# EAGLE board Schemat_Eagle (EAGLE 9.2.2)
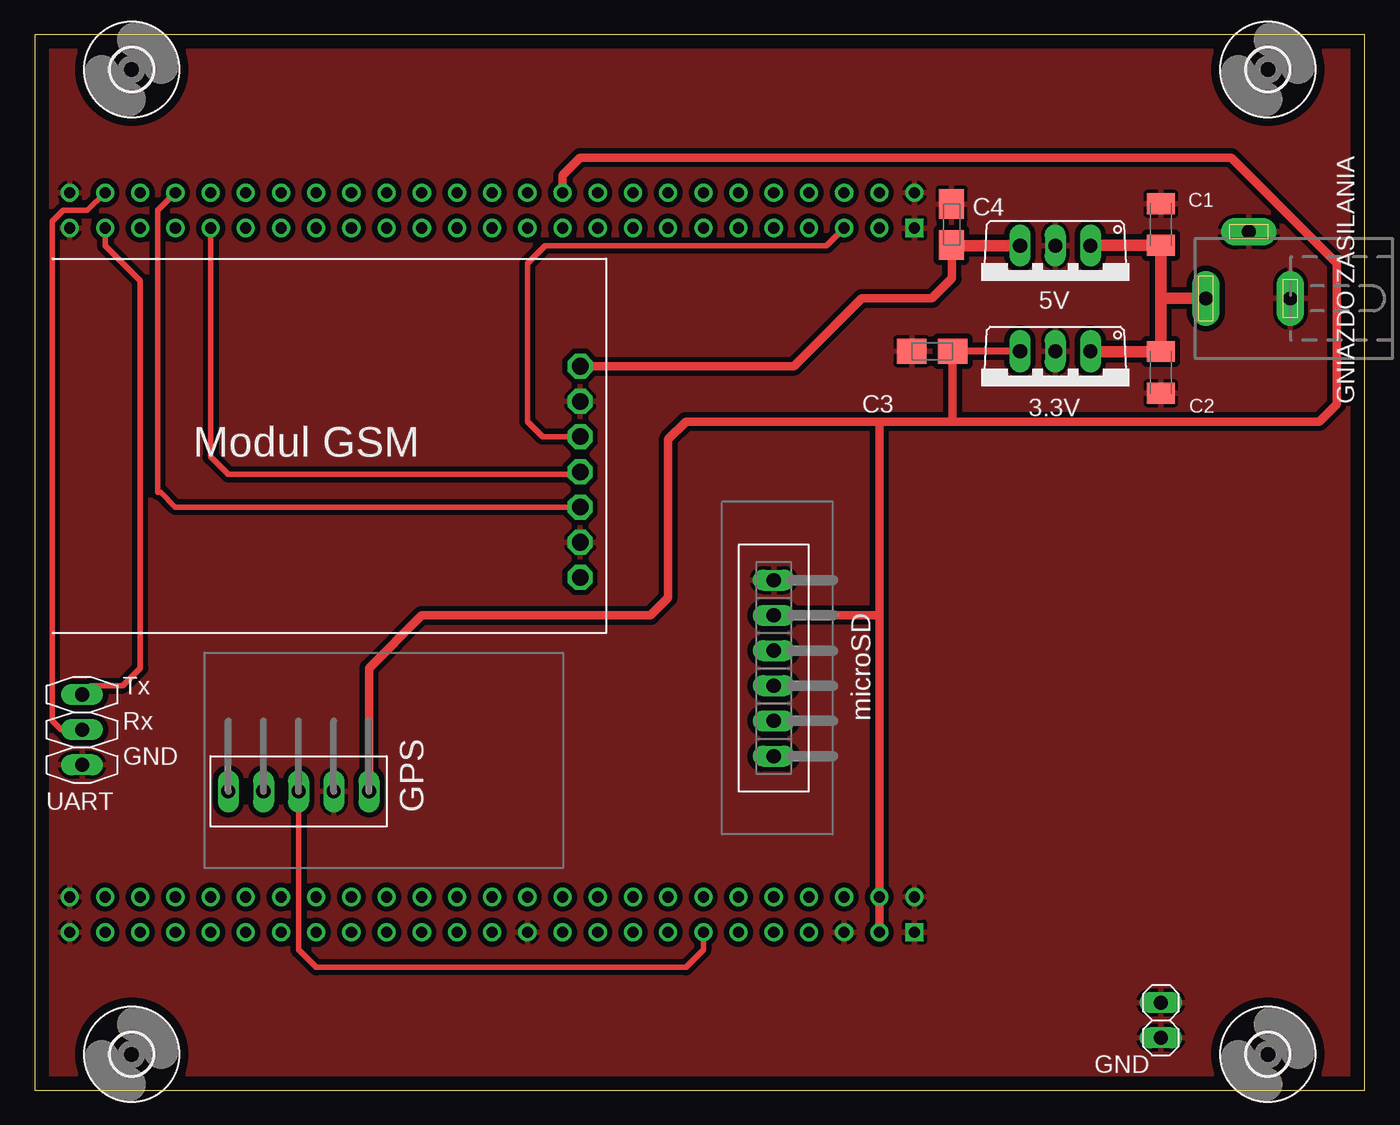
[diagram p0: board, top side]
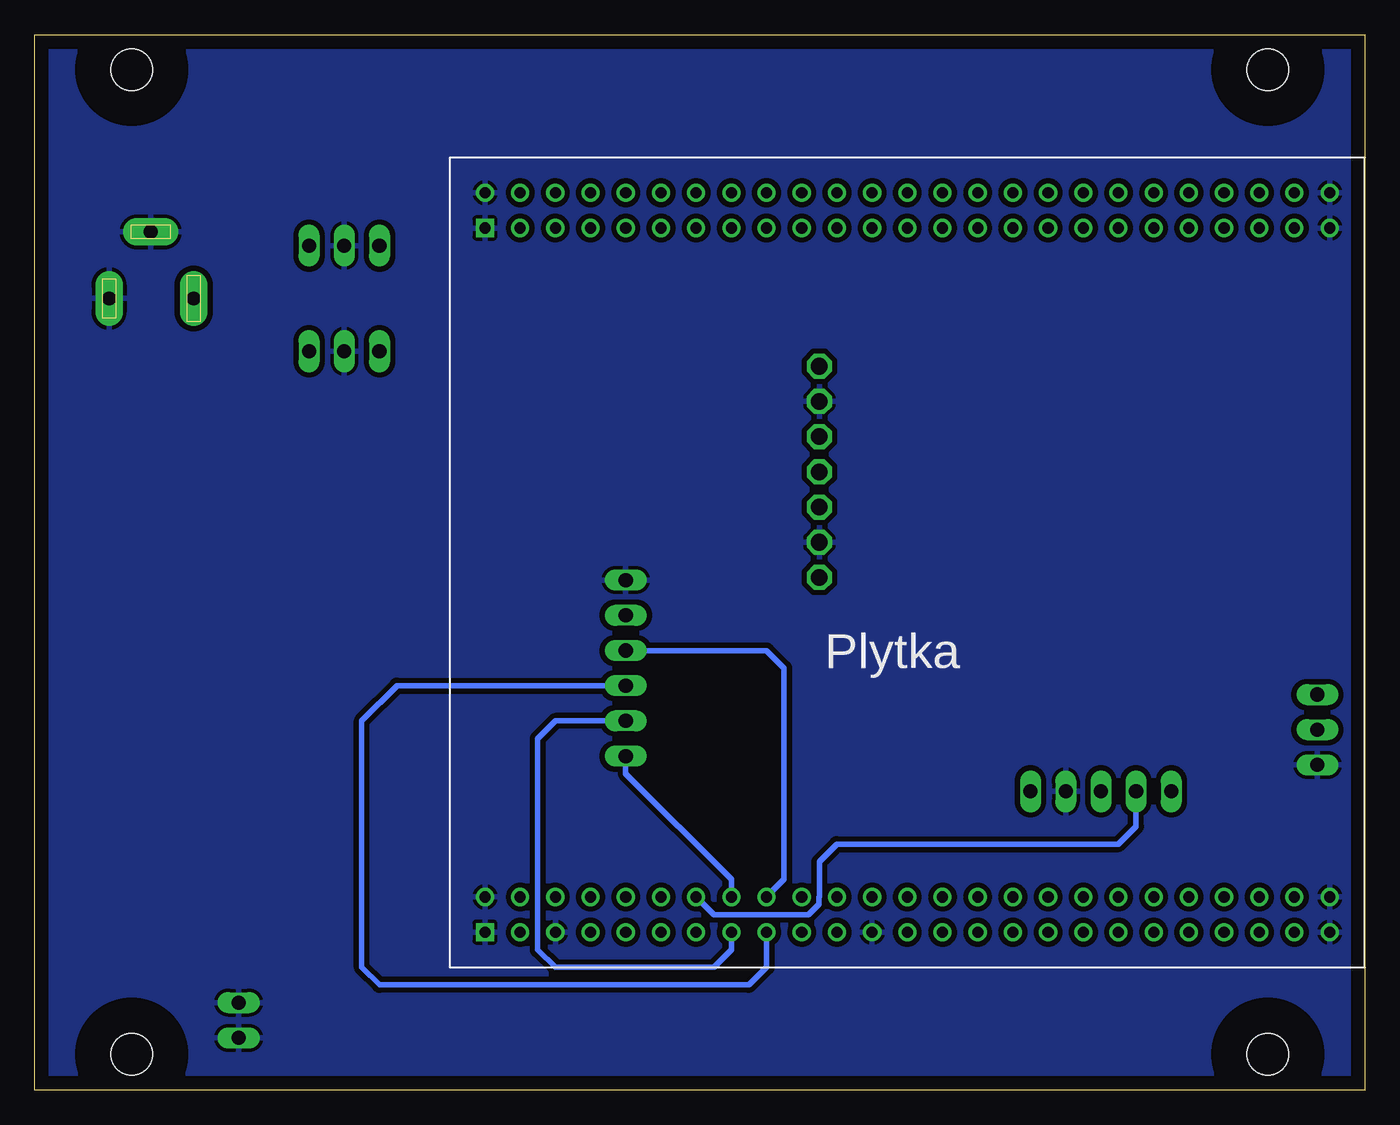
[diagram p1: board, bottom side, seen from below]

Size 96 x 76.16 mm. Coordinates in mm from the lower left corner, seen from the top.
Outline: 0,0 96,0 96,76.16 0,76.16 0,0
Copper layers (1*16): Top 0.035mm / dielectric 1.5mm / Bottom 0.035mm
Design rules "default *": minimum track width 0.4mm, minimum drill 0.5mm, track to track 15mil, track to pad 15mil, pad to pad 15mil, via to via 15mil, smd to smd 15mil, copper to edge 40mil, drill to drill 15mil, minimum pad ring 10mil, minimum via ring 8mil, stop-mask expansion 4mil, vias tented up to drill 0mil, thermal gap 10mil

## Footprints (pad centres in the part's own frame; a part is rotated, then mirrored left to right if it is on the bottom)
TO220V = drill 1.016 long: 1 -2.54,-2.54; 2 0,-2.54; 3 2.54,-2.54
C1206K = smd 1.5 x 2: 1 -1.5,0; 2 1.5,0
A/3216-18W = smd 2.15 x 1.8: + 1.475,0; - -1.475,0
1X02 = drill 1.016 long: 1 -1.27,0; 2 1.27,0
DCJ0202 = drill 1 pad 2 long: 1 0,3.1; 2 4.8,0; 3 0,-3
3,0 = hole 3: 0,0
MODUL_GPS = drill 1.016 long: GND 0,2.54; PPS(NC) 0,-5.08; RXD 0,-2.54; TXD 0,0; VCC 0,5.08
MODUL_GSM = drill 1.2 octagon: 5V 38.1,19.24; GND 38.1,16.7; GND@2 38.1,6.54; RST(NC) 38.1,4; RXD 38.1,9.08; TXD 38.1,11.62; VDD 38.1,14.16
STM32F4-DISCOVERY = drill 0.8 square: P$1 -27.94,30.48; P$51 22.86,30.48 | drill 0.8: P$2 -25.4,30.48; P$3 -27.94,27.94; P$4 -25.4,27.94; P$5 -27.94,25.4; P$6 -25.4,25.4; P$7 -27.94,22.86; P$8 -25.4,22.86; P$9 -27.94,20.32; P$10 -25.4,20.32; P$11 -27.94,17.78; P$12 -25.4,17.78; P$13 -27.94,15.24; P$14 -25.4,15.24; P$15 -27.94,12.7; P$16 -25.4,12.7; P$17 -27.94,10.16; P$18 -25.4,10.16; P$19 -27.94,7.62; P$20 -25.4,7.62; P$21 -27.94,5.08; P$22 -25.4,5.08; P$23 -27.94,2.54; P$24 -25.4,2.54; P$25 -27.94,0; P$26 -25.4,0; P$27 -27.94,-2.54; P$28 -25.4,-2.54; P$29 -27.94,-5.08; P$30 -25.4,-5.08; P$31 -27.94,-7.62; P$32 -25.4,-7.62; P$33 -27.94,-10.16; P$34 -25.4,-10.16; P$35 -27.94,-12.7; P$36 -25.4,-12.7; P$37 -27.94,-15.24; P$38 -25.4,-15.24; P$39 -27.94,-17.78; P$40 -25.4,-17.78; P$41 -27.94,-20.32; P$42 -25.4,-20.32; P$43 -27.94,-22.86; P$44 -25.4,-22.86; P$45 -27.94,-25.4; P$46 -25.4,-25.4; P$47 -27.94,-27.94; P$48 -25.4,-27.94; P$49 -27.94,-30.48; P$50 -25.4,-30.48; P$52 25.4,30.48; P$53 22.86,27.94; P$54 25.4,27.94; P$55 22.86,25.4; P$56 25.4,25.4; P$57 22.86,22.86; P$58 25.4,22.86; P$59 22.86,20.32; P$60 25.4,20.32; P$61 22.86,17.78; P$62 25.4,17.78; P$63 22.86,15.24; P$64 25.4,15.24; P$65 22.86,12.7; P$66 25.4,12.7; P$67 22.86,10.16; P$68 25.4,10.16; P$69 22.86,7.62; P$70 25.4,7.62; P$71 22.86,5.08; P$72 25.4,5.08; P$73 22.86,2.54; P$74 25.4,2.54; P$75 22.86,0; P$76 25.4,0; P$77 22.86,-2.54; P$78 25.4,-2.54; P$79 22.86,-5.08; P$80 25.4,-5.08; P$81 22.86,-7.62; P$82 25.4,-7.62; P$83 22.86,-10.16; P$84 25.4,-10.16; P$85 22.86,-12.7; P$86 25.4,-12.7; P$87 22.86,-15.24; P$88 25.4,-15.24; P$89 22.86,-17.78; P$90 25.4,-17.78; P$91 22.86,-20.32; P$92 25.4,-20.32; P$93 22.86,-22.86; P$94 25.4,-22.86; P$95 22.86,-25.4; P$96 25.4,-25.4; P$97 22.86,-27.94; P$98 25.4,-27.94; P$99 22.86,-30.48; P$100 25.4,-30.48
WYPROWADZENIE_UART = drill 1.016 long: GND 0,-1.27; RXD 0,1.27; TXD 0,3.81
MICROSD = drill 1.016 long: CS 0,6.35; GND 0,-6.35; MISO 0,-1.27; MOSI 0,1.27; SCK 0,3.81; VCC 0,-3.81

## Placement (x,y rotation side)
3.3V  7805TV  [TO220V]  73.66,50.78 180 top
5V  7805TV  [TO220V]  73.66,58.4 180 top
C1  100n  [C1206K]  81.28,62.46 90 top
C2  100n  [C1206K]  81.28,51.8 270 top
C3  2.2u  [A/3216-18W]  64.77,53.32 0 top
C4  2.2u  [A/3216-18W]  66.17,62.46 270 top
GND  [1X02]  81.28,5.06 90 top
GNIAZDO_ZASILANIA  WEJSCIE_VCC  [DCJ0202]  87.63,57.13 90 top
H1  MOUNT-HOLE3.0  [3,0]  7,2.6 0 top
H2  MOUNT-HOLE3.0  [3,0]  89,2.6 0 top
H3  MOUNT-HOLE3.0  [3,0]  89,73.64 0 top
H4  MOUNT-HOLE3.0  [3,0]  7,73.64 0 top
U$1  MODUL_GPS  [MODUL_GPS]  19.05,21.57 270 top
U$3  MODUL_GSM  [MODUL_GSM]  1.27,33 0 top
U$4  STM32F4-DISCOVERY  [STM32F4-DISCOVERY]  33.02,39.35 90 bottom
U$5  WYPROWADZENIE_UART  [WYPROWADZENIE_UART]  3.43,24.74 0 top
U$6  MICROSD  [MICROSD]  53.34,30.46 180 top

## Library data of the parts
3.3V 5V = linear
C1-C4 = rcl; SPICEPREFIX: C
GND = pinhead
GNIAZDO_ZASILANIA U$1 U$3-U$6 = Mateusz_uC
H1-H4 = holes

## Nets
3V: U$3.VDD U$4.P$55
3V_2: U$4.P$56
5V: U$4.P$54
5V_2: U$4.P$53
BOOT0: U$4.P$71
GND: 3.3V.2 5V.2 C1.2 C2.2 C3.- C4.- GND.1 GND.2 GNIAZDO_ZASILANIA.2 GNIAZDO_ZASILANIA.3 U$1.GND U$3.GND U$3.GND@2 U$4.P$1 U$4.P$2 U$4.P$5 U$4.P$23 U$4.P$49 U$4.P$50 U$4.P$51 U$4.P$52 U$4.P$99 U$4.P$100 U$5.GND U$6.GND
NC: U$4.P$48
NRST: U$4.P$6
PA0: U$4.P$12
PA1: U$4.P$11
PA2_TX: U$1.RXD U$4.P$14
PA3_RX: U$1.TXD U$4.P$13
PA4: U$4.P$16 U$6.CS
PA5: U$4.P$15 U$6.SCK
PA6: U$4.P$18 U$6.MISO
PA7: U$4.P$17 U$6.MOSI
PA8: U$4.P$93
PA9_TX: U$3.RXD U$4.P$94
PA10_RX: U$3.TXD U$4.P$91
PA13: U$4.P$92
PA14: U$4.P$89
PA15: U$4.P$90
PB0: U$4.P$22
PB1: U$4.P$21
PB2: U$4.P$24
PB3: U$4.P$78
PB4: U$4.P$75
PB5: U$4.P$76
PB6: U$4.P$73
PB7: U$4.P$74
PB8: U$4.P$69
PB9: U$4.P$70
PB10: U$4.P$34
PB11(NC): U$4.P$35
PB12: U$4.P$36
PB13: U$4.P$37
PB14: U$4.P$38
PB15: U$4.P$39
PC0: U$4.P$8
PC1: U$4.P$7
PC2: U$4.P$10
PC3: U$4.P$9
PC4: U$4.P$20
PC5: U$4.P$19
PC6_TX: U$4.P$97 U$5.TXD
PC7_RX: U$4.P$98 U$5.RXD
PC8: U$4.P$95
PC9: U$4.P$96
PC10: U$4.P$87
PC11: U$4.P$88
PC12: U$4.P$85
PC13: U$4.P$62
PC14: U$4.P$59
PC15: U$4.P$60
PD0: U$4.P$86
PD1: U$4.P$83
PD2: U$4.P$84
PD3: U$4.P$81
PD4: U$4.P$82
PD5: U$4.P$79
PD6: U$4.P$80
PD7: U$4.P$77
PD8: U$4.P$40
PD9: U$4.P$41
PD10: U$4.P$42
PD11: U$4.P$43
PD12: U$4.P$44
PD13: U$4.P$45
PD14: U$4.P$46
PD15: U$4.P$47
PE0: U$4.P$67
PE1: U$4.P$68
PE2: U$4.P$65
PE3: U$4.P$66
PE4: U$4.P$63
PE5: U$4.P$64
PE6: U$4.P$61
PE7: U$4.P$25
PE8: U$4.P$26
PE9: U$4.P$27
PE10: U$4.P$28
PE11: U$4.P$29
PE12: U$4.P$30
PE13: U$4.P$31
PE14: U$4.P$32
PE15: U$4.P$33
PH0: U$4.P$57
PH1: U$4.P$58
V1: 5V.3 C4.+ U$3.5V
V2: 3.3V.3 C3.+ U$1.VCC U$4.P$3 U$4.P$4 U$4.P$72 U$6.VCC
VI: 3.3V.1 5V.1 C1.1 C2.1 GNIAZDO_ZASILANIA.1

## Tracks (layer width: path | path; a pad name or v marks a point on that pad's centre or on a via)
3V
  Top 0.406: U$3.VDD 36.64,47.16 35.56,48.24 35.56,59.67 36.83,60.94 57.15,60.94 U$4.P$55
GND
  pour Top: -1.27,-1.29 -1.27,77.45 97.79,77.45 97.79,-1.29
  pour Bottom: -2.54,76.18 -2.54,-1.29 97.79,-1.29 97.79,78.72 -2.54,78.72
PA2_TX
  Bottom 0.406: U$1.RXD 16.51,19.03 17.78,17.76 38.1,17.76 39.37,16.49 39.37,13.95 39.4,13.92 39.4,13.44 40.16,12.68 46.99,12.68 U$4.P$14
PA3_RX
  Top 0.406: U$1.TXD 19.05,10.14 20.32,8.87 46.99,8.87 48.26,10.14 U$4.P$13
PA4
  Bottom 0.406: U$6.CS 53.34,22.84 45.72,15.22 U$4.P$16
PA5
  Bottom 0.406: U$6.SCK 58.42,26.65 59.69,25.38 59.69,10.14 58.42,8.87 46.99,8.87 45.72,10.14 U$4.P$15
PA6
  Bottom 0.406: U$6.MISO 43.18,31.73 41.91,30.46 41.91,15.22 U$4.P$18
PA7
  Bottom 0.406: U$6.MOSI 69.85,29.19 72.39,26.65 72.39,8.87 71.12,7.6 44.45,7.6 43.18,8.87 U$4.P$17
PA9_TX
  Top 0.406: U$3.RXD 10.16,42.08 9.08,43.16 8.89,43.16 8.89,63.48 U$4.P$94
PA10_RX
  Top 0.406: U$4.P$91 12.7,45.7 13.97,44.43 39.37,44.43 U$3.TXD
PC6_TX
  Top 0.406: U$4.P$97 5.08,60.94 7.62,58.4 7.62,30.46 6.35,29.19 4.06,29.19 U$5.TXD
PC7_RX
  Top 0.406: U$4.P$98 3.81,63.48 2.06,63.48 1.27,62.69 1.27,26.65 1.91,26.02 U$5.RXD
V1
  Top 0.508: 66.22,60.94 C4.+
  Top 0.61: 66.22,60.94 66.22,58.58 64.77,57.13 59.69,57.13 54.8,52.24 U$3.5V
  Top 0.813: 5V.3 66.22,60.94
V2
  Top 0.508: 3.3V.3 C3.+
  Top 0.61: C3.+ 66.25,48.24 | 66.25,48.24 92.71,48.24 93.98,49.51 93.98,59.67 86.36,67.29 39.37,67.29 38.1,66.02 U$4.P$72 | 60.96,34.27 U$6.VCC | U$1.VCC 24.13,30.46 27.94,34.27 44.45,34.27 45.72,35.54 45.72,46.97 46.99,48.24 60.96,48.24 | 60.96,34.27 U$4.P$4 U$4.P$3 | 66.25,48.24 60.96,48.24 | 60.96,34.27 60.96,48.24
VI
  Top 0.813: 81.28,57.13 C2.1 76.22,53.3 3.3V.1 | 81.28,57.13 C1.1 76.22,60.96 5V.1 | GNIAZDO_ZASILANIA.1 81.28,57.13